# Altium PCB NPC_PCB.PcbDoc
Units mm, origin at the board's own origin, x right, y up, seen from the top; angles counter-clockwise.
Board outline 36.72 x 48.97 mm, 2 copper layers (Top Layer, Bottom Layer); 7 components, 5 nets, 19 pads, 5 vias.
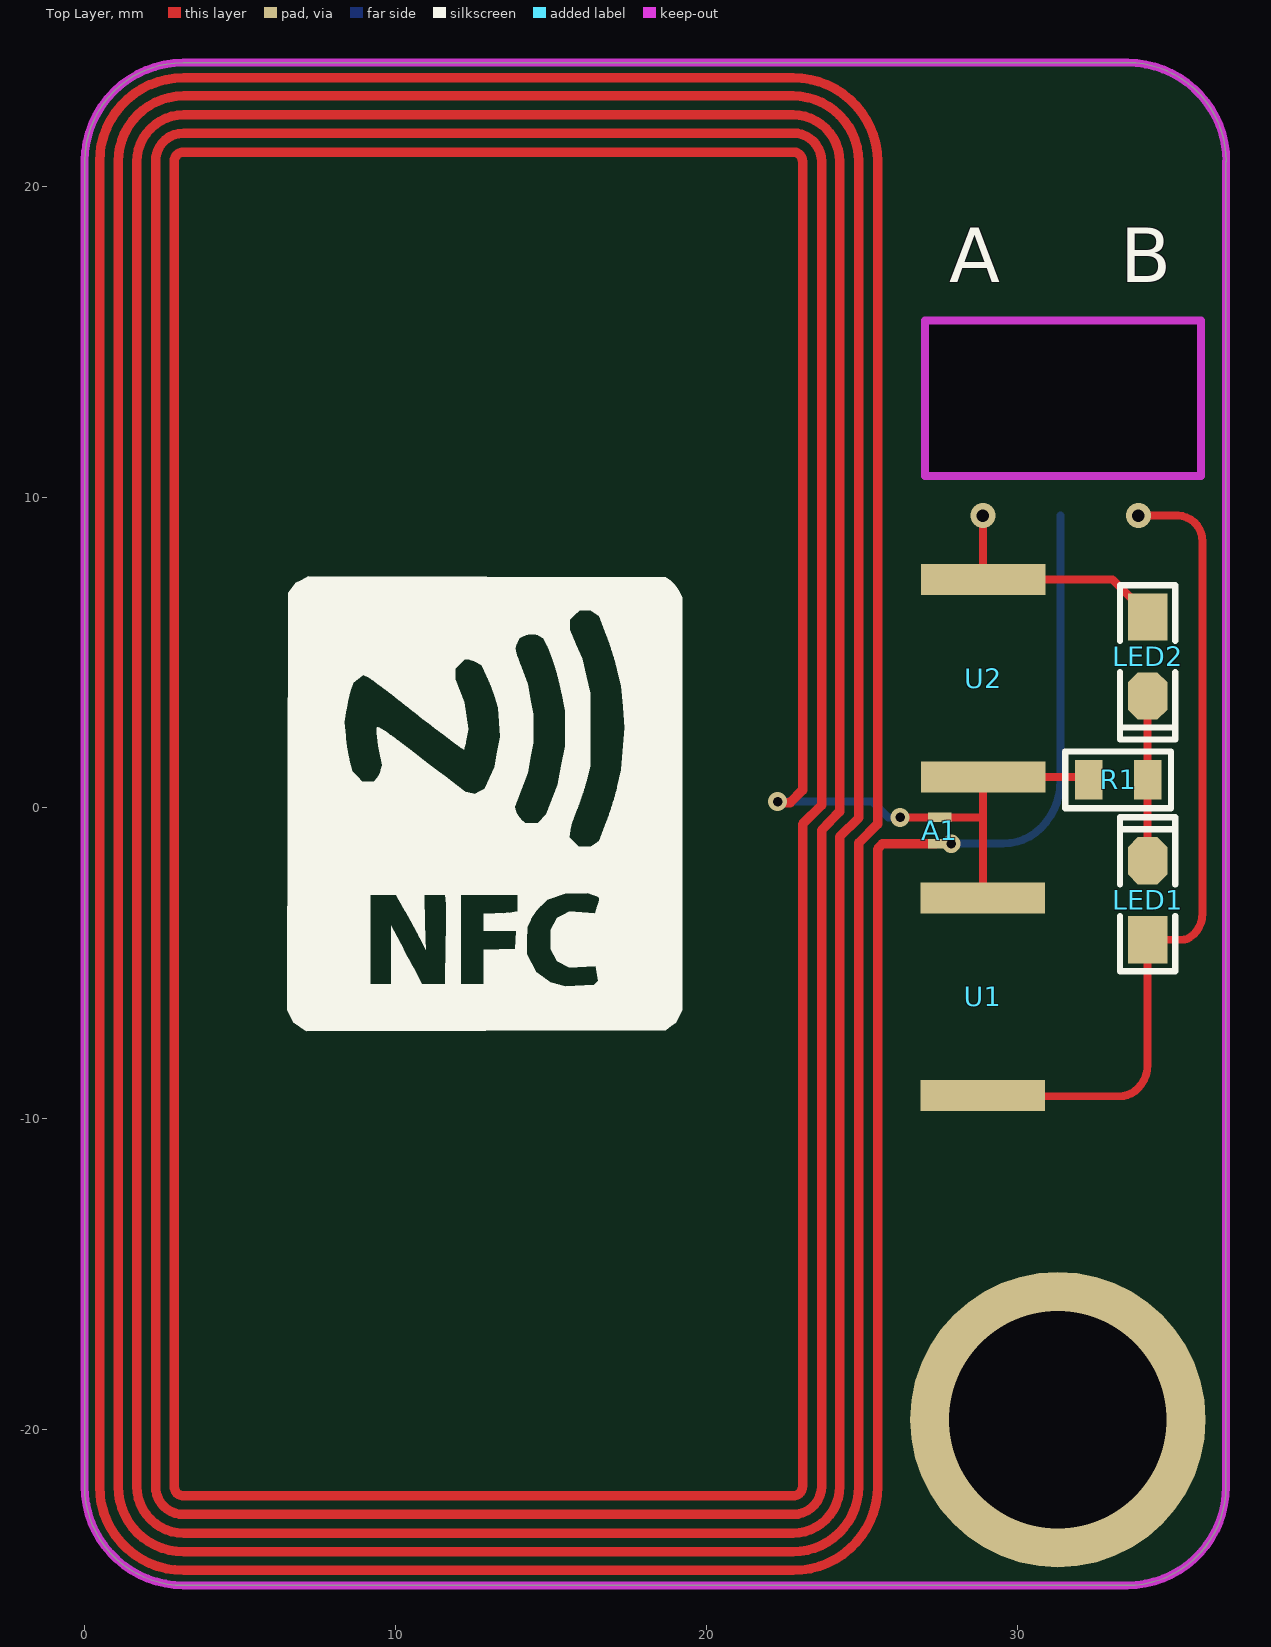
[diagram p0: Top Layer view]
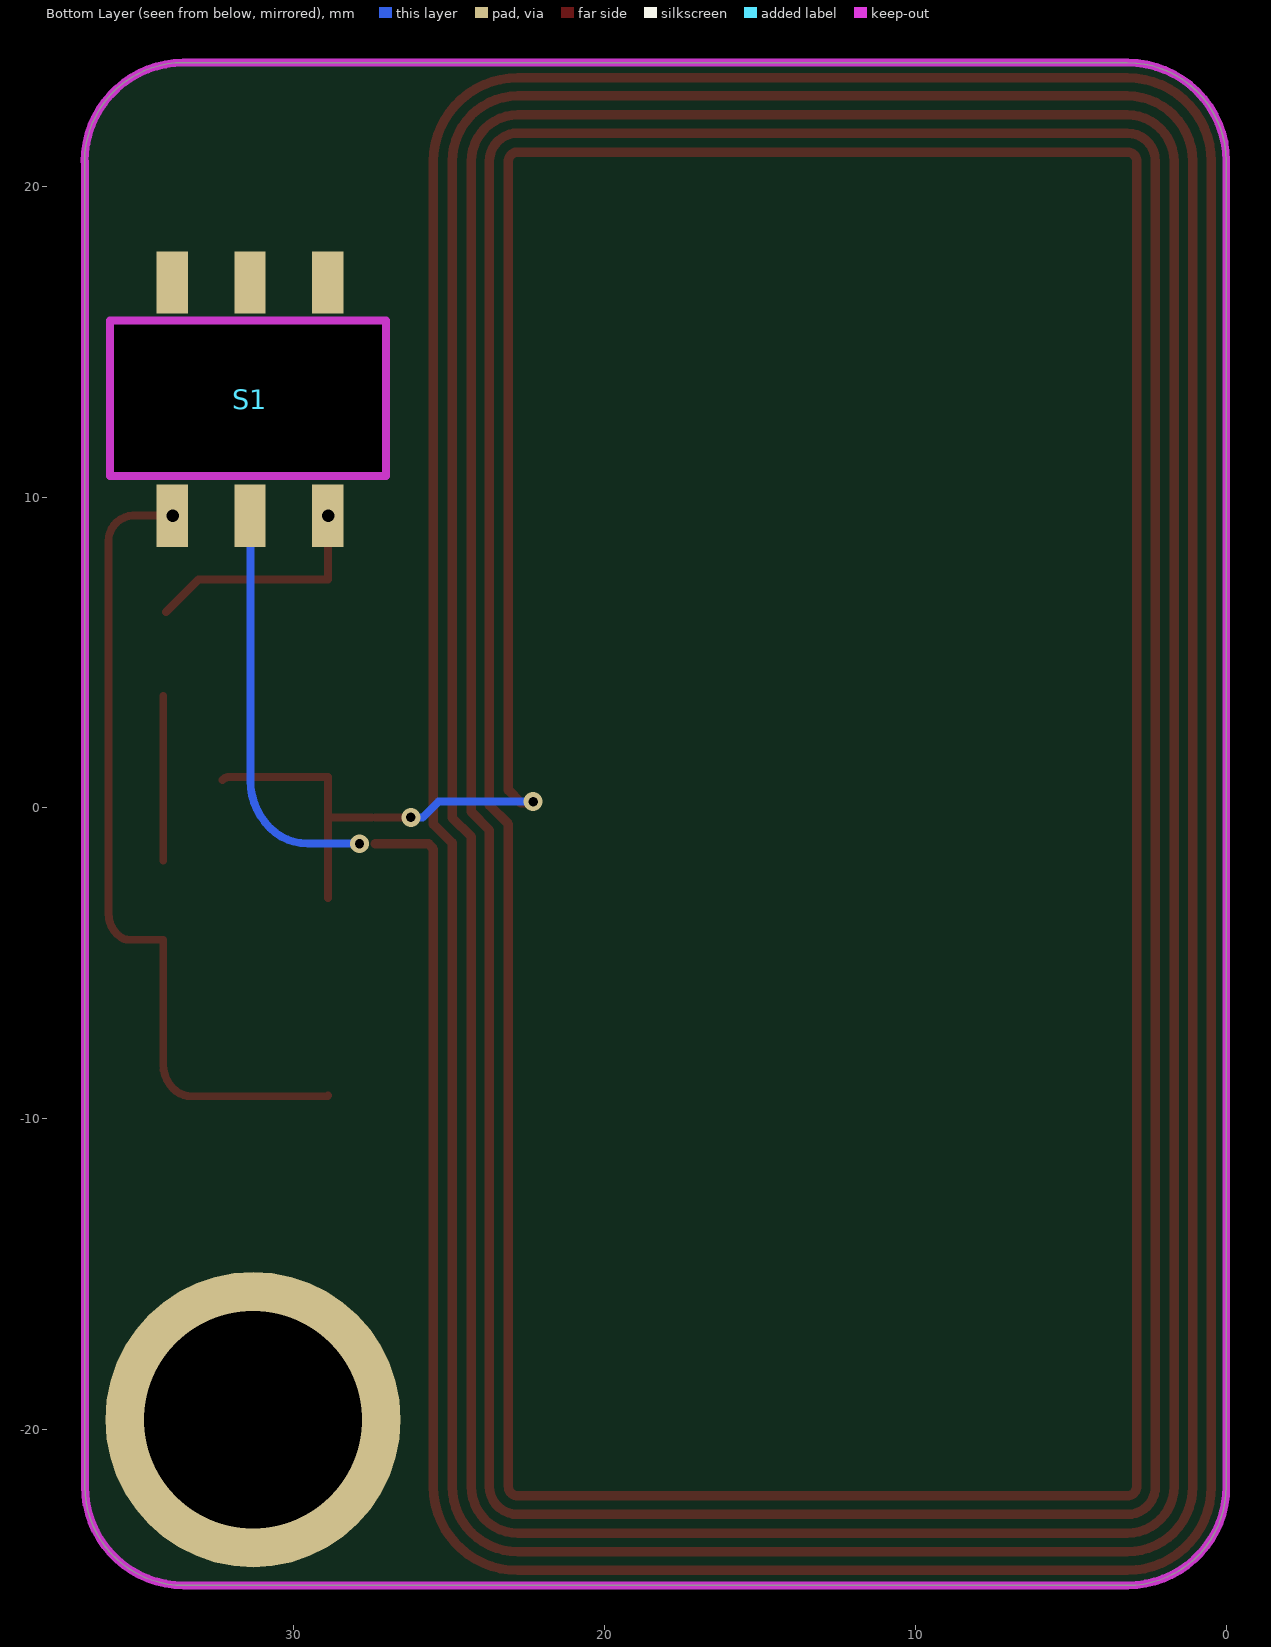
[diagram p1: Bottom Layer view, seen from below]
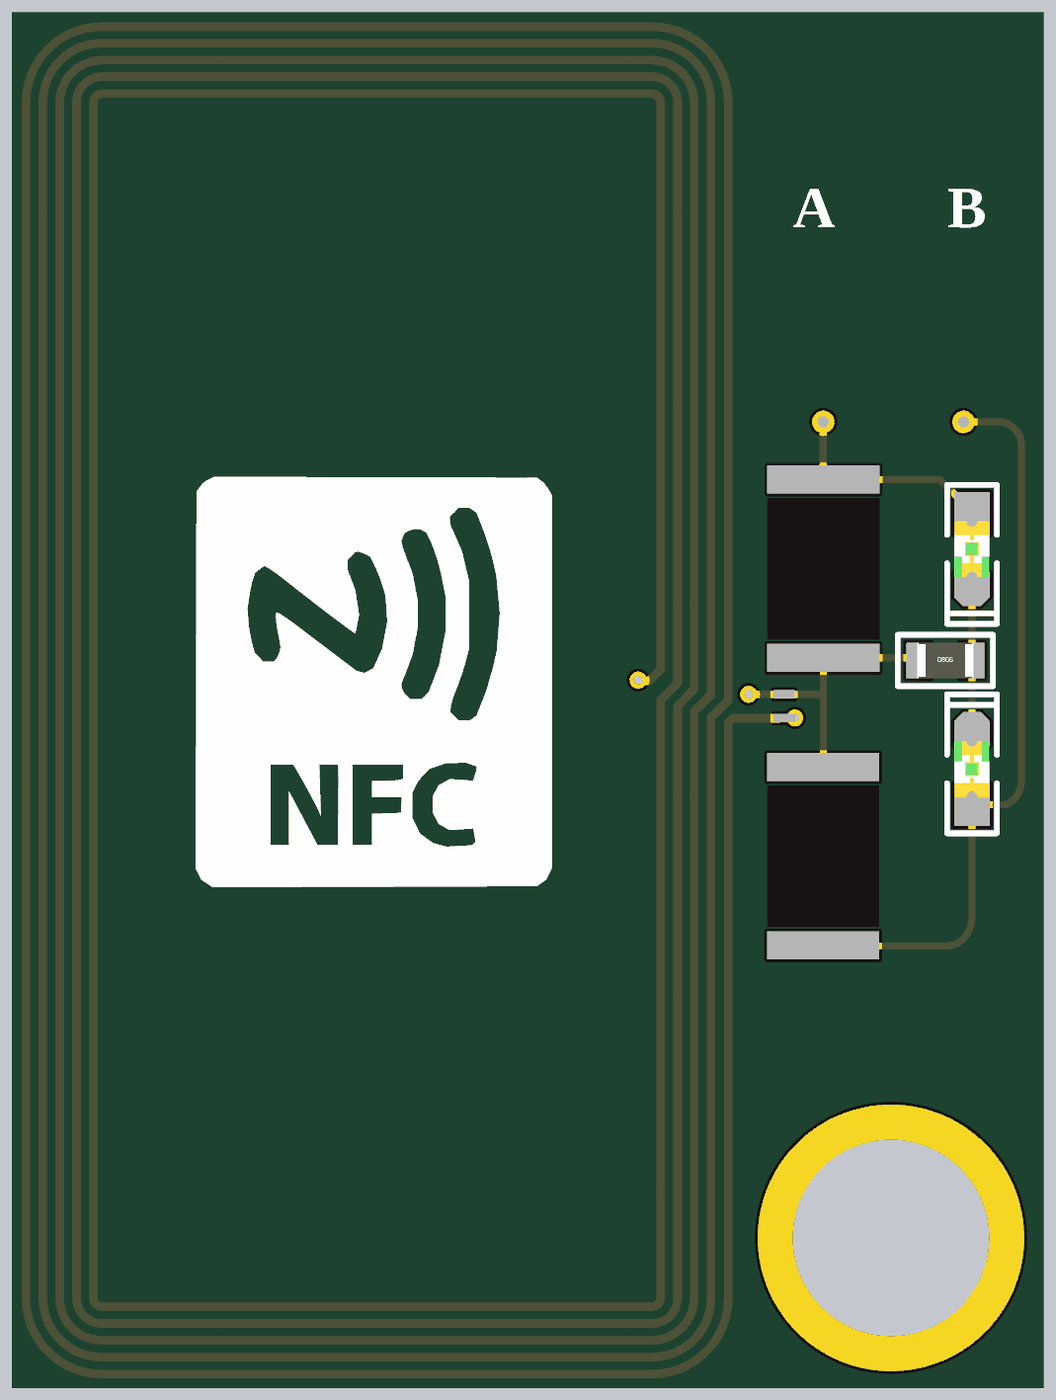
[diagram p2: 3D render of the assembled board from above, using the file's embedded part models]

## Layer stack, top to bottom
Top Solder: solder mask 0.0102, Solder Resist, Dk 3.5
Top Layer: signal copper 0.0356
Dielectric 1: dielectric 0.32, FR-4, Dk 4.8
Bottom Layer: signal copper 0.0356
Bottom Solder: solder mask 0.0102, Solder Resist, Dk 3.5

## Board outline
0,-21.82 0,20.805 cw(c3.18,20.79) 3.18,23.97 33.535,23.97 cw(c33.535,20.79) 36.715,20.79 36.705,20.8 36.705,-21.82 cw(c33.525,-21.82) 33.525,-25 3.18,-25 cw(c3.18,-21.82)
cut-out: 27.025,10.68 35.897,10.68 35.897,15.68 27.025,15.68

## Design rules (kind name [scope] priority, off if disabled: settings)
Clearance [All] p1: gap=0.254 ignorepadtopadclearanceinfootprint=FALSE except(0: Arc-Hole Track-Hole SMDPad-Hole THPad-Hole Via-Hole Fill-Hole Poly-Hole Region-Hole Text-Hole)
PolygonConnect [All] p1: connectstyle=Relief reliefconductorwidth=0.254 reliefentries=4 polygonreliefangle="90 Angle" airgapwidth=0.254
RoutingVias [All] p1: holewidth=0.711 width=1.27 viastyle="Through Hole" minholewidth=0.711 minwidth=1.27 maxholewidth=0.711 maxwidth=1.27
SolderMaskExpansion [All] p1: expansion=0.102 istentingtop=FALSE
Width [All] p1: maxlimit=0.254 minlimit=0.254 preferedwidth=0.254
30 further rules are at their usual default settings.

## Components (designator, comment, footprint, x,y, rotation, side; value= is the part's Value field where it differs from the comment)
A1 "NFC_ANTENNA_53x22" NFC_ANTENNA_53X22 27.496,-0.304 r90 top
LED1 "BL-HB337A-AV-TRB" "LED 0805R" 34.186,-2.968 r90 top
LED2 "BL-HB337A-AV-TRB" "LED 0805R" 34.186,4.872 r270 top
R1 "100Ω" "R 0805_L" 33.236,0.902 r0 top
S1 "" KEY 31.397,13.149 r180 bottom
U1 "NFC Chip" COB-213 28.886,-6.073 r270 top
U2 "NFC Chip" COB-213 28.893,4.17 r90 top locked

## Footprints (in the part's own frame and the unit in brackets; to place one, negate y for a bottom-side part, rotate by r counter-clockwise, add the part's x,y. Pads: shape width x height; smd on the part's side, far side on the other; paste and mask are expansions set on the pad)
COB-213 [mm]
  rect 1x4 smd: 1(-3.175,0) 2(3.175,0)
KEY [mm]
  rect 1x2 smd: 0(-2.5,3.75) 0(0,3.75) 0(2.5,3.75) 1(-2.5,-3.75) 2(0,-3.75) 3(2.5,-3.75)
  body extent -4.5,-2.5 4.5,2.5
"LED 0805R" [mil] "红色0805LED"
  rect 60x50 smd: 1(-50,0)
  oct 60x50 smd: 2(50,0)
  silkscreen extent -90,-35 105,35, body extent -39,-25 39,25, height 32
NFC_ANTENNA_53X22 [mil]
  rect 12x30 smd: 1(-33.46,0) 2(0,0)
  Top Layer lines w10: 0,50 0,5
  Top Layer lines w12: 18.68,195.89 18.68,189.39 34.57,173.5 830.5,173.5 ccw(c830.5,185.5) 842.5,185.5 ; -33.5,5 -33.5,41.5 ; -847.08,992.76 ccw(c-847.08,957.33) -882.52,957.33 -882.51,185.5 ccw(c-846.8,185.22) -847.08,149.5 -16.37,149.5 7.5,126.5 830.5,126.5 ccw(c830.5,185.5) 889.5,185.5 889.5,957.33 ccw(c830.47,957.35) 830.5,1016.38 -847.08,1016.38 ccw(c-847.08,957.33) -906.14,957.33 ; -847.08,992.76 -847.08,992.76 ; -847.08,992.76 830.5,992.76 ; 830.5,992.76 cw(c830.78,957.04) 866.5,957.33 866.5,185.5 cw(c830.5,185.5) 830.5,149.5 15.5,149.5 -8.5,173.5 -847.08,173.5 cw(c-846.99,185.41) -858.89,185.5 -858.89,957.33 cw(c-847.08,957.33) -847.08,969.14 830.5,969.14 cw(c830.59,957.23) 842.5,957.33 ; 830.5,992.76 830.5,992.76 ; -906.14,957.33 -906.14,957.33 ; -906.14,957.33 -906.14,185.5 ccw(c-847.11,185.53) -847.08,126.5 -24.25,126.5 -0.5,102.5 830.5,102.5 ccw(c830.5,185.5) 913.5,185.5 913.5,957.33 ccw(c830.66,957.17) 830.5,1040 -847.08,1040.01 ccw(c-847.08,957.33) -929.76,957.33 -929.76,185.5 ccw(c-846.92,185.34) -847.08,102.5 -32.12,102.5 -8.5,78.5 830.5,78.5 ccw(c830,185) 936.5,185.5 936.5,957.33 ccw(c830.35,957.48) 830.5,1063.63 -847.08,1063.63 ccw(c-847.08,957.33) -953.38,957.33 -953.38,185.5 ccw(c-846.73,185.15) -847.08,78.5 -39.99,78.5 -33.5,72.5 -33.5,46.5 ; 842.5,957.33 ccw(c830.59,957.23) 842.5,957.33 ; 842.5,957.33 842.5,957.33 ; 842.5,957.33 842.5,185.5 ; 842.5,185.5 842.5,185.5 ; -33.5,46.5 -33.5,41.5 ; -33.5,46.5 -33.5,41.5
  Bottom Layer lines w10: 20,205 20,85 0,65 0,50
"R 0805_L" [mil] "1/8W贴片电阻"
  rect 35x50 smd: 1(-37.4,0) 2(37.4,0)
  silkscreen extent -67,-36 67,36, body extent -39,-25 39,25, height 20

## Part data
LED1 LED2: BOM_JLCPCB Part Class="Extended Part", BOM_Manufacturer=BrtLed, BOM_Manufacturer Part=BL-HB337A-AV-TRB, BOM_Supplier=LCSC, BOM_Supplier Part=C165977, Contributor=LCSC, spicePre=L, spiceSymbolName=BL-HB337A-AV-TRB
R1: BOM_JLCPCB Part Class="Basic Part", BOM_Manufacturer=UniOhm, BOM_Manufacturer Part=0402WGF1000TCE, Resistance (Ohms)=100, BOM_Supplier=LCSC, BOM_Supplier Part=C25076, nameAlias=Resistance, spicePre=R, spiceSymbolName=0402WGF1000TCE
S1: library part "SS12D10G4 071"
U1 U2: BOM_JLCPCB Part Class="Basic Part", BOM_Manufacturer=UniOhm, BOM_Manufacturer Part=0603WAF1002T5E, Resistance (Ohms)=10K, BOM_Supplier=LCSC, BOM_Supplier Part=C25804, nameAlias=Resistance, spicePre=R, spiceSymbolName=0603WAF1002T5E
A1: Contributor=Lockon, spicePre=U, spiceSymbolName=NFC_ANTENNA_53x22

## Free pads (board coordinates)
  round 9.5 hole 7: 0(31.3,-19.67)

## Via types
v1: diameter 0.61, hole 0.305, Top Layer to Bottom Layer, 2 vias
v2: diameter 0.8, hole 0.4, Top Layer to Bottom Layer, 2 vias
v3: diameter 0.6, hole 0.3, Top Layer to Bottom Layer, 1 vias

## Nets (pads, with @x,y where several pads share a name; then routed paths per layer and width w, separated by ;. In a path a pad name is that pad's centre, name@x,y a point inside that pad or via, vN(x,y) a via of type N, cw(c..) or ccw(c..) an arc to the next point about the centre after c; other vN are vias at no path point)
CD1: LED1.1 S1.1 U1.2 | length 26.7
  Top Layer w0.254: U1.2 28.908,-9.27 33.272,-9.27 33.273,-9.27 ccw(c33.273,-8.43) 33.867,-9.024 33.868,-9.023 ccw(c33.098,-8.254) 34.186,-8.254 34.186,-7.598 34.186,-4.873 LED1.1 35.302,-4.238 35.303,-4.238 ccw(c35.303,-3.819) 35.537,-4.167 ccw(c35.012,-3.39) 35.95,-3.39 35.95,8.576 35.95,8.577 ccw(c35.119,8.577) 35.022,9.402 v2(33.886,9.402)
CD2: LED2.1 S1.3 U2.2 | length 7.7
  Top Layer w0.254: U2.2@28.886,7.352 v2(28.886,9.402) ; U2.2 33.055,7.345 LED2.1@34.1,6.3
NetA1_1: A1.1 S1.2 | length 13.2
  Bottom Layer w0.254: v3(27.875,-1.145) 29.54,-1.145 ccw(c29.54,0.568) 30.752,-0.643 ccw(c29.22,0.888) 31.386,0.888 S1.2@31.386,9.402
  other v1: 26.226,-0.304 22.289,0.204
NetA1_2: A1.2 R1.1 U1.1 U2.1 | length 8.7
  Top Layer w0.254: A1.2 28.893,-0.304 ; U1.1 28.893,-2.891 28.893,-0.304 ; R1.1 ccw(c32.061,0.676) 32.061,0.995 U2.1 28.893,-0.304
NetLED1_2: LED1.2 LED2.2 R1.2 | length 5.3
  Top Layer w0.254: LED1.2 R1.2 LED2.2
pads on no net: S1.0

## Keep-outs
Keep-Out Layer:
  lines w0.254: 36.705,20.8 36.705,-21.82 cw(c33.525,-21.82) 33.525,-25 3.18,-25 cw(c3.18,-21.82) 0,-21.82 0,20.805 cw(c3.18,20.79) 3.18,23.97 33.535,23.97 cw(c33.535,20.79) 36.715,20.79 ; 27.025,10.68 27.025,15.68 35.897,15.68 35.897,10.68 27.025,10.68

## Silkscreen, mask and mechanical layers (free items; w line width, h text height)
Top Overlay:
  region: 36 vertices and 6 holes, not listed, extent 6.521,-7.176 19.221,7.449
  text "A" at 27.803,16.33 h3
  text "B" at 33.303,16.33 h3